# Altium PCB ShareBoard - i.MXRT1050_REV2 by wcabc.PcbDoc (part 2 of 3)
Units mil, origin at the board's own origin, x right, y up, seen from the top; angles counter-clockwise.
Board outline 1968.5 x 1968.5 mil, 4 copper layers (Top Layer, GND, POWER, Bottom Layer), stack 30.635 mil thick; 185 components, 196 nets, 977 pads, 468 vias.
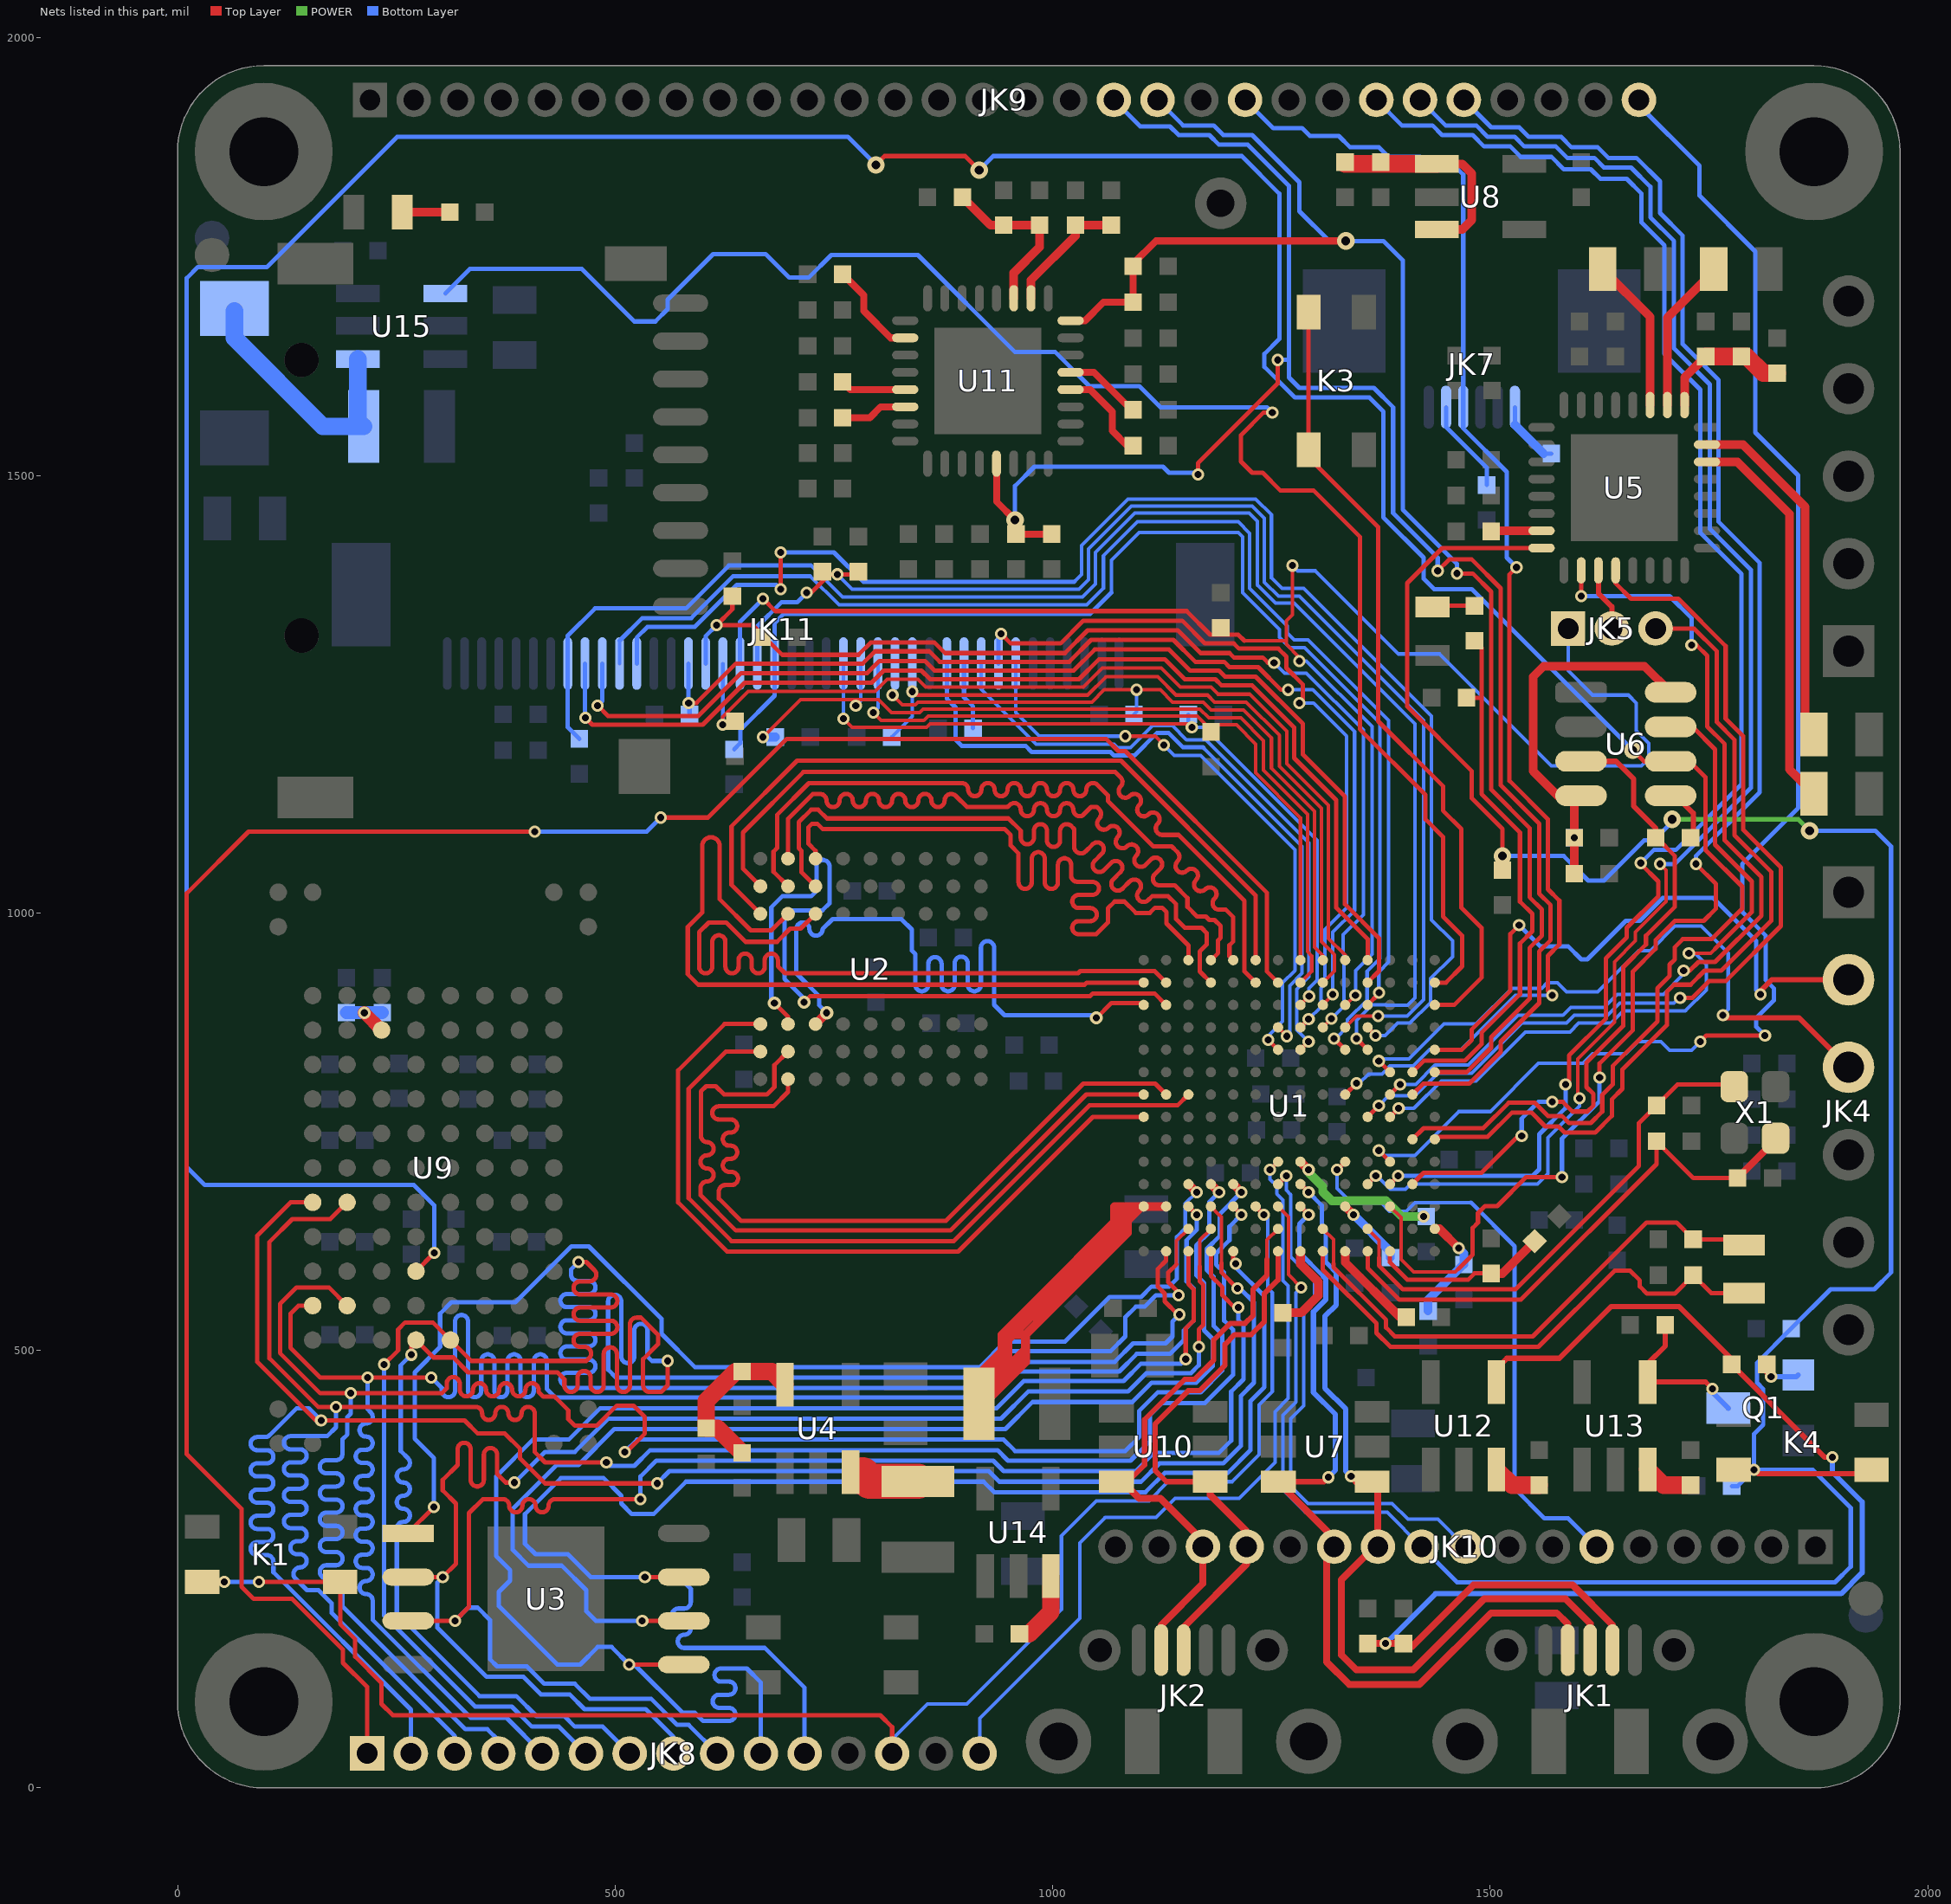
[diagram p4: the nets of this part, all layers, seen from the top]

## Via types
v1: diameter 14, hole 8, Top Layer to Bottom Layer, 294 vias
v2: diameter 20, hole 10, Top Layer to Bottom Layer, 65 vias
v3: diameter 15, hole 8, Top Layer to Bottom Layer, 53 vias
v4: diameter 30, hole 15, Top Layer to Bottom Layer, 50 vias
v5: diameter 16, hole 8, Top Layer to Bottom Layer, 3 vias
v6: diameter 40, hole 20, Top Layer to Bottom Layer, 2 vias
v7: diameter 50, hole 25, Top Layer to Bottom Layer, 1 vias

## Nets (pads, with @x,y where several pads share a name; then routed paths per layer and width w, separated by ;. In a path a pad name is that pad's centre, name@x,y a point inside that pad or via, vN(x,y) a via of type N, cw(c..) or ccw(c..) an arc to the next point about the centre after c; other vN are vias at no path point) (continued)
I2C3/UART3/GPIO/ADC6: JK10.6 U1.K10 | length 671.3
  Top Layer w5: v1(1324.97,706.34) U1.K10@1334.32,715.68
  Bottom Layer w4: v1(1324.97,706.34) 1324.97,685.03 1341.84,668.16 1375.84,668.16 1385,659 1404,659 1414,669 1478,669
  Bottom Layer w5: 1478,669 1528,619 1528,342 1562,308 1589.24,308 JK10.6@1621.65,275.59
JTAG_CLK: JK4.3 U1.F12 | length 742.9
  Top Layer w5: v1(1372.7,830.84) U1.F12@1385.5,818.05
  Top Layer w6: v1(1766,883) 1769,880 1853.07,880 JK4.3@1909.45,823.62
  Bottom Layer w4: v1(1372.7,830.84) 1374.86,833 1407,833 1447,873 1484,873 1525,914 1559,914 1565,920 1577,920 1587,910 1623,910 1670,957 1683,957 1711,985 1741,985 1772,954 1772,890 v1@1766,884
JTAG_SWD: JK4.2 U1.E14 | length 709.6
  Top Layer w5: U1.E14@1436.68,843.64 1467.64,843.64 1479,855 1479,867 1523,911 1523,976 v1(1533,986)
  Top Layer w6: v1(1809,907) 1809,911 1821.62,923.62 JK4.2@1909.45,923.62
  Bottom Layer w5: v1(1533,986) 1557,962 1589,962 1604,947 1611,947 1655,991 1671,991 1697,1017 1755,1017 1804,968 1804,912 v1(1809,907)
KEY1: K3.2 K3.4 U1.C14 | length 908.8
  Top Layer w5: K3.2@1292.5,1686.74 K3.4@1292.5,1529.26 1292.5,1520.5 1372,1441 1372,1219 1446,1145 1446,1117 1467,1096 1467,1006 1490,983 1490,926 1458.82,894.82 U1.C14@1436.68,894.82
KEY/GPIO/ADC2: JK9.24 U1.L12 | length 1814.1
  Top Layer w5: U1.L12@1385.5,690.09 v1(1394.84,699.44) ; v1(1586,804) 1590,808 1590,837 1632,879 1632,948 1656,972 1656,983 1692,1019 1692,1036 1672,1056 v1(1672,1057)
  Bottom Layer w5: JK9.24@1369.88,1929.13 1399.02,1900 1434,1900 1445,1889 1480,1889 1493,1876 1523,1876 1535,1864 1570,1864 1584,1850 1615,1850 1626,1839 1656,1839 1673,1822 1673,1789 1699,1763 1699,1639 1740,1598 1740,1434.5 1787,1387.5 1787,1147 1712,1072 1687,1072 v1(1672,1057) ; v1(1394.84,699.44) 1548.44,699.44 1556,707 1556,747 1586,777 v1(1586,804)
KEY/GPIO/ADC3: JK9.30 U1.K12 | length 1725.8
  Top Layer w5: v1(1372.7,728.48) U1.K12@1385.5,715.68 ; v1(1740,853) 1747,860 v1(1814,860)
  Bottom Layer w4: v1@1373.22,729 v1(1372.7,728.48) 1378.18,723 1414,723 1464,773 1500,773 1555,828 1606,828 1617,839 1655,839 1669,853 1695,853 1705,843 1730,843 v1(1740,853)
  Bottom Layer w5: JK9.30@1669.88,1929.13 1669.88,1923.12 1739,1854 1739,1820 1803,1756 1803,1549 1852,1500 1852,1120 1788,1056 1788,1001 1815,974 1815,923 1824,914 1824,900 1804,880 1804,870 v1(1814,860)
LCD_BL: U1.B14 U15.4 | length 1943.2
  Top Layer w5: v1(1251,1572) 1241,1572 1215,1546 1215,1516 1228,1503 1240,1503 1260,1483 1298,1483 1351,1430 1351,1210 1426,1135 1426,1107 1446,1087 1446,996 1468,974 1468,939 1449.41,920.41 U1.B14@1436.68,920.41
  Bottom Layer w5: U15.4@306,1708 334,1736 462,1736 522,1676 546,1676 560,1690 560,1701 612,1753 672,1753 699,1726 721,1726 747,1752 846,1752 957,1641 1003,1641 1042,1602 1099,1602 1123,1578 1245,1578 v1(1251,1572)
LCD_CLK: JK11.11 U1.D7 | length 797.9
  Top Layer w4: U1.D7@1257.54,869.23 v1(1267.66,859.11)
  Bottom Layer w4: 1172,1189 1285,1076 1285,931 1270.82,916.82 1270.82,862.28 v1(1267.66,859.11)
  Bottom Layer w5: JK11.11@879.01,1285 879.01,1244.99 889,1235 889,1198 896,1191 969,1191 976,1184 1066,1184 1070,1180 1093.5,1180 1119,1205.5 1132.59,1205.5 1148.59,1189.5 1171.48,1189.5 1171.98,1189 1172.48,1188.5
LCD_D0: JK11.17 R43.2 U1.C8 | length 877.6
  Top Layer w4: v1(761,1222) 771,1212 856,1212 860,1216 1155,1216 v1(1159,1212) ; U1.C8@1283.13,894.82 v1(1293,904.68)
  Bottom Layer w4: JK11.17@760.9,1285 760.9,1222.1 v1(761,1222) ; R43.2@1155,1227 1155,1216 v1(1159,1212) 1173,1212 1302,1083 1302,923 1293,914 v1(1293,904.68)
LCD_D1: JK11.16 R44.2 U1.B8 | length 981.6
  Top Layer w4: v1(669,1201) 712,1244 801,1244 816,1229 848,1229 852,1233 1168.31,1233 1178.31,1223 1215,1223 1241,1197 1241,1163 1291.13,1112.87 1291.13,955.87 1296,951 1296,933.28 U1.B8@1283.13,920.41
  Bottom Layer w4: v1(775,1237) 780.58,1242.58 JK11.16@780.58,1285
  Bottom Layer w10: v1(669,1201) R44.2@683,1201
LCD_D2: JK11.15 R45.2 U1.A8 | length 782.4
  Top Layer w4: v1(795,1229) 804,1220 852.69,1220 857.69,1225 1165,1225 1175,1215 1210,1215 1232,1193 1232,1160 1283.13,1108.87 U1.A8@1283.13,946
  Bottom Layer w4: v1(795,1229) 800.27,1234.27 JK11.15@800.27,1285
LCD_D3: JK11.14 R46.2 U1.A9 | length 774.9
  Top Layer w4: v1(817,1249) 828,1238 843.02,1238 846.01,1240.99 1045,1241 1059,1255 v1(1096,1255) 1123,1255 1137,1241 1172,1241 1181,1232 1218,1232 1250,1200 1250,1165.37 1299.13,1116.24 1299.13,961 1308.72,951.41 U1.A9@1308.72,946
  Bottom Layer w4: R46.2@1093,1227 1096,1230 v1(1096,1255)
LCD_D4: JK11.13 R41.2 U1.B9 | length 833.4
  Top Layer w4: v1(839.64,1253) 843.64,1249 1040,1249 1061,1270 1120,1270 1141,1249 1177,1249 1185,1241 1221,1241 1259,1203 1259,1167.69 1307.13,1119.55 1307.13,967 1322,952.13 1322,933.68 U1.B9@1308.72,920.41
  Bottom Layer w4: R41.2@816,1201 839.64,1224.64 v1(839.64,1253)
LCD_D5: JK11.26 R42.2 U1.C9 | length 1227.1
  Top Layer w4: U1.C9@1308.72,894.82 v1@1318.59,904.68
  Top Layer w5: v1(584,1240) 593,1240 638,1285 783,1285 797,1299 859,1299 871,1287 1019,1287 1044,1312 1138,1312 1163,1287 1196,1287 1202,1281 1235,1281 1261,1255 v1(1269,1255)
  Bottom Layer w4: v1(1269,1255) 1297,1255 1345,1207 1345,1003 1320,978 v1(1320,907)
  Bottom Layer w5: JK11.26@583.73,1285 583.73,1240.27 v1(584,1240) 585,1239 R42.2@585,1227
LCD_D6/SAI1_TD3: JK11.25 R47.2 R55.1 U1.D9 | length 1271.3
  Top Layer w4: U1.D9@1308.72,869.23 v1(1318.59,879.09)
  Top Layer w5: R55.1@634,1362 634,1347 v1(616,1329) 657,1329 691,1295 778,1295 792,1309 865,1309 877,1297 1014,1297 1040,1323 1143,1323 1169,1297 1202,1297 1207,1292 1240,1292 1246,1286 v1(1253,1286)
  Bottom Layer w4: v1(1253,1286) 1265,1274 1290,1274 1355,1209 1355,998 1332,975 1332,954 1333,953 1333,893.5 v1(1318.59,879.09)
  Bottom Layer w5: JK11.25@603.42,1285 603.42,1316.42 v1(616,1329)
LCD_D7/SAI1_TD2: JK11.24 R48.2 U1.A10 | length 1089.1
  Top Layer w4: R48.2@637,1219 627,1219 v1(623,1215) 623,1224 652,1253 797,1253 811,1267 846,1267 855,1258 1035,1258 1057,1280 1124,1280 1146,1258 1181,1258 1189,1250 1225,1250 1267.5,1207.5 1267.5,1170.5 1315.13,1122.87 1315.13,970.87 1334.32,951.68 U1.A10@1334.32,946
  Bottom Layer w4: v1(623,1215) 623.1,1215.1 JK11.24@623.1,1285
LCD_D8/SAI1_TD1: JK5.1 JK11.23 R49.2 U1.C10 | length 1982.4
  Top Layer w4: 1219,1311 1267,1311 ; v1(1274,1397) 1274,1341 1267,1334 1267,1307 1282,1292 v1(1282,1288) ; U1.C10@1334.32,894.82 1334.82,894.82 v1(1346,906)
  Top Layer w5: v1(669,1359) 683,1345 1153,1345 1180,1318 1212,1318 1219,1311
  Bottom Layer w4: v1(1274,1397) 1280,1391 1300,1391 1395,1296 1442,1296 1570,1168 1673,1168 1681,1176 1681,1194 1667,1208 1667,1240 1658,1249 1617,1249 1589,1277 JK5.1@1589,1325 ; v1(1282,1288) 1290,1288 1365,1213 1365,953 1346,934 v1(1346,906)
  Bottom Layer w5: JK11.23@642.79,1285 642.79,1332.79 v1(669,1359)
LCD_D9: JK11.22 R50.2 R56.1 U1.D10 | length 1496.1
  Top Layer w4: U1.D10@1334.32,869.23 1347.09,882 v1(1372,882)
  Top Layer w5: v1(719,1366) 724,1366 R50.2@745,1387 ; R50.2@737,1390 740,1387 R50.2@745,1387 ; R56.1@778,1390 775,1387 v1(754,1387) R50.2@745,1387
  Bottom Layer w4: v1(754,1387) 771,1370 1030,1370 1041,1381 1041,1416 1090,1465 1228,1465 1242,1451 1242,1378 1258,1362 1282,1362 1424,1220 1424,901 1405,882 v1(1372,882)
  Bottom Layer w5: JK11.22@662.47,1285 662.47,1327.47 690,1355 708,1355 v1(719,1366)
LCD_D10: JK11.21 R51.2 U1.E10 | length 1454.4
  Top Layer w5: v1(1321.52,856.43) U1.E10@1334.32,843.64
  Bottom Layer w4: 1067,1366 1067,1403 1099,1435 1212,1435 1217,1430 1217,1366 1259,1324 1259,1315 1271,1303 1288,1303 1374,1217 1374,948 1359.34,933.34 1359.34,900.66 1337,878.31 1337,870 1323.43,856.43 v1(1321.52,856.43)
  Bottom Layer w5: R51.2@636,1187 643,1194 643,1209 682.16,1248.16 JK11.21@682.16,1285 682.16,1331.16 693,1342 1043,1342 1067,1366
LCD_D11: JK11.33 R52.2 U1.E11 | length 1772.6
  Top Layer w5: v1(1347.11,856.43) U1.E11@1359.91,843.64
  Bottom Layer w4: 724,1397 760,1361 1034,1361 1049,1376 1049,1412 1094,1457 1224.69,1457 1234,1447.69 1234,1374.69 1254.69,1354 1276,1354 1414,1216 1414,903 1405.61,894.61 1381.39,894.61 1381,895 1365,895 1347.11,877.11 v1(1347.11,856.43)
  Bottom Layer w5: R52.2@459,1199 445.94,1212.06 JK11.33@445.94,1285 445.94,1316.94 477,1348 581,1348 630,1397 724,1397
LCD_D12: JK11.32 U1.A11 | length 1247.9
  Top Layer w5: v1(466,1223) 474,1215 600,1215 648,1263 793,1263 807,1277 850,1277 860,1267 1030,1267 1053,1290 1128,1290 1151,1267 1186,1267 1193,1260 1228,1260 1276,1212 1276,1177 1324,1129 1324,1006 1359.91,970.09 U1.A11@1359.91,946
  Bottom Layer w5: JK11.32@465.62,1285 465.62,1223.38 v1(466,1223)
LCD_D13: JK11.31 U1.B11 | length 1274
  Top Layer w5: v1(480,1237) 492,1225 595,1225 644,1274 788,1274 802,1288 854,1288 865,1277 1024,1277 1048,1301 1133,1301 1157,1277 1190,1277 1197,1270 1232,1270 1286,1216 1286,1181 1334,1133 1334,1010 1373,971 1373,933.5 U1.B11@1359.91,920.41
  Bottom Layer w5: v1(480,1237) 485.31,1242.31 JK11.31@485.31,1285
LCD_D14: JK11.30 U1.C11 | length 1482.6
  Top Layer w5: U1.C11@1359.91,894.82 1373,907.91 v1(1373,909)
  Bottom Layer w4: JK11.30@504.99,1285 JK11.30@504.99,1310.99 ; 723,1385 756,1352 1039,1352 1058,1371 1058,1408 1097,1447 1212,1447 1225,1434 1225,1371 1268,1328 1268,1320 1276,1312 1292,1312 1384,1220 1384,944 1372.7,932.7 v1@1372.7,907.61
  Bottom Layer w5: JK11.30@504.99,1310.99 531,1337 587,1337 635,1385 723,1385
LCD_D15: JK11.29 U1.D11 | length 1663.5
  Top Layer w5: v1(689,1370) v1(689,1412) ; U1.D11@1359.91,869.23 v1@1369.07,860.07
  Bottom Layer w4: 1025,1379 1033,1387 1033,1420 1086,1473 1232,1473 1250,1455 1250,1383 1262,1371 1287,1371 1433,1225 1433,992 1457,968 1457,950 1432,925 1432,897.69 1408.31,874 1394,874 1380,860 v1(1369,860)
  Bottom Layer w5: JK11.29@524.68,1285 524.68,1314.68 537,1327 591,1327 639,1375 684,1375 v1(689,1370) ; v1(689,1412) 750,1412 783.5,1378.5 1024.5,1378.5 1025,1379
LCD_EN: JK11.7 U1.E7 | length 686.2
  Top Layer w4: v1(1083,1202) 1117,1202 v1(1127,1192)
  Top Layer w5: v1(1246.13,855.05) U1.E7@1257.54,843.64
  Bottom Layer w4: JK11.7@957.75,1285 957.75,1229 984.75,1202 v1(1083,1202) ; v1(1127,1192) 1139,1180 1169,1180 1277,1072 1277,934.31 1262.82,920.13 1262.82,876 1246.13,859.32 v1(1246.13,855.05)
LCD_HSYNC: JK11.9 U1.E8 | length 749.1
  Top Layer w5: U1.E8@1283.13,843.64 v1(1292.48,852.98)
  Bottom Layer w4: JK11.9@918.38,1285 918.38,1255.62 981,1193 1070,1193 1074,1189 1089,1189 1114,1214 1137,1214 1153,1198 1175,1198 1293,1080 1293,927 1279,913 1279,866.46 v1(1292.48,852.98)
LCD_VSYNC: JK11.8 U1.D8 | length 878
  Top Layer w5: v1(941,1319) 952,1308 1009,1308 1035,1334 1148,1334 1174,1308 1207,1308 1213,1302 1258,1302 1267,1293 1267,1280 1286,1261 1286,1244 v1(1282,1240) ; U1.D8@1283.13,869.23 v1(1292.48,878.57)
  Bottom Layer w4: v1(1282,1240) 1298,1240 1336,1202 1336,1006 1311,981 1311,919 1306.5,914.5 1306.5,892.59 v1(1292.48,878.57)
  Bottom Layer w5: JK11.8@938.06,1285 938.06,1315.06 v1@940,1317
LED1: R12.2 R15.2 U1.F13 | length 621.9
  Top Layer w5: U1.F13@1411.09,818.05 1424.04,831 1471,831 1490,850 1490,863 1534,907 1534,965 1548,979 1548,999 1534,1013 1534,1092 1490,1136 1490,1245 ; R15.2@1473,1246 1489,1246 1490,1245 ; R12.2@1482,1311 1490,1303 1490,1245
NetC1_1: C1.1 U1.N11 X1.1 | length 591.1
  Top Layer w4: U1.N11@1359.91,638.91 1373,625.82 1373,606
  Top Layer w5: 1373,606 1373,597 1400,570 1529,570 1670,711 1670,760 C1.1@1690,780 1714,804 1776.46,804 X1.1@1778.94,801.53
NetC2_1: C2.1 R38.1 U1.P11 X1.2 | length 628
  Top Layer w5: U1.P11@1359.91,613.32 1359.91,594.09 1396,558 1535,558 1690,713 C2.1@1690,739 1732,697 R38.1@1782.56,697
  Top Layer w8: R38.1@1782.56,697 1826.18,740.62 X1.2@1826.18,742.47
NetC3_1: C3.1 U1.N9 X2.1 | length 613.7
  Top Layer w4: U1.N9@1308.72,638.91 1321,626.64 1321,599
  Top Layer w5: 1321,599 1321,595 1381,535 1381,526 1391,516 1548.5,516 1678.5,646 1713,646 C3.1@1732,627 X2.1@1786,627
NetC4_1: C4.1 U1.P9 X2.2 | length 613.5
  Top Layer w5: U1.P9@1308.72,613.32 1308.72,592.28 1370,531 1370,520 1386,504 1555,504 1642,591 1660,591 1671,580 1671,573 1679,565 1711,565 C4.1@1732,586 1752.56,565.44 X2.2@1790,565.44
NetC8_1: C8.1 FB2.1 U1.N14 | length 128.5
  Top Layer w10: U1.N14@1436.68,638.91 1442.09,638.91 v1(1464,617)
  Bottom Layer w10: FB2.1@1429,545 1429,558 1469,598 C8.1@1470,598 1470,611 v1(1464,617)
NetC11_1: C11.1 U5.14 | length 450.6
  Top Layer w10: U5.14@1747.66,1515.53 1782.46,1515.53 1842,1456 1842,1164.01 C11.1@1870.01,1136
NetC13_1: C13.1 FB1.1 U1.P12 | length 204.4
  Top Layer w5: U1.P12@1385.5,613.32 1385.5,600.5 1405,581 1475,581 1482,588 C13.1@1501,588
  Top Layer w10: C13.1@1501,588 1514,588 FB1.1@1550.86,624.86
NetC14_1: C14.1 U1.P8 | length 107.8
  Top Layer w10: C14.1@1263,543 1284,543 1303.5,562.5 1303.5,578.5 1283.13,598.87 U1.P8@1283.13,613.32
NetC15_1: C15.1 U1.P10 | length 112.3
  Top Layer w10: U1.P10@1334.32,613.32 1334.32,604.68 1334.32,600.68 1397,538 C15.1@1404,538 ; C15.1@1399,540 C15.1@1403,540
NetC20_2: C20.2 U1.M10 | length 79.9
  Top Layer w10: U1.M10@1334.32,664.5 v1(1343.66,655.16)
  Bottom Layer w10: v1(1343.66,655.16) 1386,612.82 C20.2@1386,606
NetC21_1: C21.1 R3.2 U8.1 U8.3 | length 247.1
  Top Layer w10: U8.3@1439,1781 1468,1781 1479,1792 1479,1845 1468,1856 U8.1@1439,1856
  Top Layer w20: R3.2@1334,1856 U8.1@1439,1856
NetC27_1: C27.1 U5.19 | length 177.9
  Top Layer w10: C27.1@1628.5,1736 1628.5,1735.5 1682.69,1681.31 U5.19@1682.69,1580.5
NetC28_1: C28.1 C47.1 R1.1 U5.17 | length 155.2
  Top Layer w10: U5.17@1722.07,1580.5 1722.07,1611.91 C47.1@1746.16,1636
  Top Layer w20: C47.1@1746.16,1636 C28.1@1787.16,1636 1793,1636 1812,1617 R1.1@1828,1617
NetC29_1: C29.1 U5.31 | length 57.8
  Top Layer w10: C29.1@1501.16,1436 1501.93,1436.77 U5.31@1558.66,1436.77
NetC42_1: C42.1 R7.2 R8.1 U4.5 | length 193.9
  Top Layer w20: C42.1@645,383 617,411 R7.2@604,411 604,442 638,476 R8.1@645,476 679,476 U4.5@694,461
NetC43_1: C43.1 U5.15 | length 406
  Top Layer w10: U5.15@1747.66,1535.22 1788.78,1535.22 1860,1464 1860,1214.01 C43.1@1870.01,1204
NetC44_1: C44.1 U5.18 | length 177.5
  Top Layer w10: U5.18@1702.38,1580.5 1702.38,1680.38 1755.5,1733.5 C44.1@1755.5,1736
NetC45_1: C45.1 C46.1 R9.1 U6.4 U6.8 | length 441.2
  Top Layer w10: R9.1@1596,1045 v1(1596,1086) 1596,1126.13 U6.4@1603.82,1133.94 1577.06,1133.94 1549,1162 1549,1270 1561,1282 1676.24,1282 U6.8@1706.18,1252.06
NetC48_1: C48.1 C49.1 U9.E4 | length 69
  Top Layer w15: v1(213.43,885.83) U9.E4@233.11,866.14
  Bottom Layer w15: C49.1@192.95,886 213.25,886 v1(213.43,885.83) 213.6,886 C48.1@233.95,886
NetC51_2: C51.2 C52.2 FB3.1 U11.3 | length 197
  Top Layer w10: FB3.1@897,1818 929,1786 C51.2@944,1786 C52.2@985,1786 985,1761 955.54,1731.53 U11.3@955.54,1702.5
NetC53_1: C53.1 C55.1 U11.2 | length 145.5
  Top Layer w10: U11.2@975.22,1702.5 975.22,1723.22 1026,1774 C55.1@1026,1786 C53.1@1067,1786
NetC70_2: C70.2 U1.K8 | length 172.1
  Top Layer w10: U1.K8@1283.13,715.68 v1(1292.48,706.34)
  POWER w10: v1(1292.48,706.34) 1292.48,703.38 1308.48,687.38 1308.48,681.52 1319,671 1336.87,671 1337.03,671.16 1380.84,671.16 1399,653 v1(1424,653)
NetD1_1: D1.1 L2.2 U15.1 | length 300.3
  Bottom Layer w20: D1.1@65,1688 65,1657 166,1556 L2.2@212.69,1556 206,1562.69 U15.1@206,1633
NetJK5_2: JK5.2 U5.3 | length 72.9
  Top Layer w6: U5.3@1623.62,1391.5 1623.62,1365.38 1639,1350 JK5.2@1639,1325
NetJK7_2: JK7.2 R58.1 | length 108.3
  Bottom Layer w5: JK7.2@1449.47,1578 1449.47,1555.53 1496,1509 R58.1@1496,1489
NetJK7_6: JK7.6 R57.1 | length 75.6
  Bottom Layer w5: JK7.6@1528.21,1557.79 JK7.6@1528.21,1578 ; R57.1@1561,1525 R57.1@1570,1525
  Bottom Layer w10: JK7.6@1528.21,1557.79 R57.1@1561,1525
NetJK11_10: JK11.10 R32.1 | length 78.3
  Bottom Layer w5: JK11.10@898.69,1285 898.69,1246.31 909,1236 R32.1@909,1211
NetL1_1: L1.1 U4.3 | length 66.2
  Top Layer w40: 783,358 790.69,350.31 L1.1@846,350.31
NetL3_1: L3.1 U1.M1 U1.M2 | length 1043.5
  Top Layer w10: L3.1@915.69,460.69 949,494 949,512 999,562 1080,643 ; L3.1@915.69,472.69 942,499 942,518 ; 1080,647.5 1097,664.5 ; 1080,664 1080,643 ; 1085.25,652.75 1085.25,634.25 969,518 ; 1090.25,657.75 1090.25,653.25 ; U1.M1@1101.5,664.5 1090.25,653.25 ; U1.M2@1129.59,664.5 U1.M1@1104,664.5 1070.5,664.5 1070.5,646.5 985,561 942,518 ; 942,518 969,518 ; 969,501 969,487 921,439 L3.1@915.69,439 915.69,447.69 969,501 ; 969,501 969,518 ; 1080,643 1090.25,653.25
NetLED1_1: LED1.1 R12.1 | length 48.6
  Top Layer w5: LED1.1@1434,1349.56 1435.44,1351 R12.1@1482,1351
NetLED2_1: LED2.1 R13.1 | length 54.4
  Top Layer w10: LED2.1@256.56,1801 R13.1@311,1801
NetQ1_1: Q1.1 R36.1 | length 47.9
  Top Layer w6: R36.1@1816,484 1816,475 v1(1821,470)
  Bottom Layer w6: v1(1821,470) 1850,470 Q1.1@1852,472
NetQ1_3: Q1.3 R35.1 U13.4 | length 180.1
  Top Layer w6: R35.1@1700,529 1700,505 1680,485 U13.4@1680,464 1746,464 v1(1754,456)
  Bottom Layer w6: v1(1754,456) 1754,452 Q1.3@1772,434
NetR2_2: R2.2 U6.5 | length 62.1
  Top Layer w6: U6.5@1706.18,1133.94 1712.06,1133.94 1732,1114 R2.2@1732,1086
NetR22_2: R22.2 U11.14 | length 76.7
  Top Layer w8: R22.2@760,1566 791,1566 803.47,1578.47 U11.14@831.5,1578.47
NetR23_2: R23.2 U11.13 | length 75.2
  Top Layer w8: R23.2@760,1607 768.85,1598.15 U11.13@831.5,1598.15
NetR24_1: R24.1 U11.29 | length 89.2
  Top Layer w8: U11.29@1020.5,1617.85 1047.16,1617.85 1090,1575 R24.1@1092,1575
NetR25_1: R25.1 U11.28 | length 111
  Top Layer w8: U11.28@1020.5,1598.15 1042.84,1598.15 1068,1573 1068,1551 1085,1534 R25.1@1092,1534
NetR29_2: R29.2 U11.10 | length 112.2
  Top Layer w8: R29.2@760,1730 784,1706 784,1688 814.78,1657.22 U11.10@831.5,1657.22
NetR33_1: R33.1 U13.3 | length 56.5
  Top Layer w20: U13.3@1680,364 1698,346 R33.1@1729,346
NetR34_1: R34.1 U12.3 | length 56.5
  Top Layer w20: U12.3@1507,364 1525,346 R34.1@1556,346
NetR37_1: R37.1 U14.3 | length 87.4
  Top Layer w20: R37.1@962,176 973,176 998,201 U14.3@998,242
ONOFF: JK8.13 K1.2 K1.4 U1.M6 | length 1858.4
  Top Layer w5: K1.2@28.26,235.5 v1(53.5,235.5) ; v1(93.01,235.5) K1.4@185.74,235.5 185.74,187.26 203,170 203,150 233,120 233,96 246,83 803,83 816.54,69.46 JK8.13@816.54,39.37 ; U1.M6@1231.95,664.5 v1(1241.3,655.16)
  Bottom Layer w4: JK8.13@816.54,39.37 816.54,55.54 857,96 902,96 1010,204 1010,288 1050,328 1110,328 1132,350 1205,350 1236,381 1236,438 1251,453 1251,566 1246,571 1246,650.46 v1(1241.3,655.16)
  Bottom Layer w5: v1(53.5,235.5) v1(93.01,235.5)
OTG1_D+: JK1.3 JK10.11 U1.L8 U7.1 | length 982.5
  Top Layer w5: U1.L8@1283.13,690.09 v1(1292.48,680.75)
  Top Layer w8: v1(1341,356) 1347,350 U7.1@1365,350 1371.65,343.35 JK10.11@1371.65,275.59 1367.59,275.59 1330,238 1330,152 1347,135 1412,135 1493,216 1586,216 1614.17,187.83 JK1.3@1614.17,157.48
  Bottom Layer w5: v1(1292.48,680.75) 1307.5,665.73 1307.5,641 1312,636.5 1312,601 1320,593
  Bottom Layer w6: 1320,593 1324,589 1324,552 1311,539 1311,457 1335,433 1335,362 v1(1341,356)
OTG1_D-: JK1.2 JK10.12 U1.M8 U7.6 | length 1000.1
  Top Layer w5: U1.M8@1283.13,664.5 v1(1292.48,655.16)
  Top Layer w6: U7.6@1258,350 1310,350 v1(1315,355)
  Top Layer w8: U7.6@1258,350 1258,349 1321.65,285.35 JK10.12@1321.65,275.59 1313,266.94 1313,144 1339,118 1419,118 1501,200 1576,200 1588.58,187.42 JK1.2@1588.58,157.48
  Bottom Layer w5: v1(1292.48,655.16) 1282,644.68 1282,612 1309,585
  Bottom Layer w6: 1309,585 1312,582 1312,558 1298,544 1298,452 1323,427 1323,363 v1(1315,355)
OTG1_ID: JK1.4 R5.2 R6.1 R36.2 U12.4 | length 1581.8
  Top Layer w6: U12.4@1507,464 1507,479 1519,491 1579,491 1638,550 1716,550 1776,490 R36.2@1776,484 1882,378 v1(1891,378)
  Top Layer w8: R6.1@1360,165 v1(1380.5,165) R5.2@1401,165 ; R5.2@1403,162 1411,162 1481,232 1594,232 1639.76,186.24 JK1.4@1639.76,157.48
  Bottom Layer w6: v1(1380.5,165) 1437.5,222 1901,222 1925,246 1925,327 1891,361 v1(1891,378)
OTG2_D+: JK2.3 JK10.14 U1.P7 U10.1 | length 635.3
  Top Layer w6: U10.1@1180,350 1130,350 1117,363 1117,416 1155,454 1168,454 1197,483 1197,507 1208,518 1227,518 1242,533 1242,565 1257.54,580.54 U1.P7@1257.54,613.32
  Top Layer w8: JK2.3@1149.61,157.48 1149.61,183.61 1221.65,255.65 JK10.14@1221.65,275.59 1221.65,293.35 1180,335 U10.1@1180,350
OTG2_D-: JK2.2 JK10.15 U1.N7 U10.6 | length 653.6
  Top Layer w4: 1245,604 1245,626.37 U1.N7@1257.54,638.91
  Top Layer w6: U10.6@1080,350 1086,350 1105,369 1105,421 1151,467 1162,467 1184,489 1184,512 1203,531 1220,531 1229,540 1229,570 1245,586 1245,604
  Top Layer w8: U10.6@1073,350 1080,350 1099,331 1123,331 1171.65,282.35 JK10.15@1171.65,275.59 1171.65,233.65 1124.02,186.02 JK2.2@1124.02,157.48
PW_ON_REQ: JK8.15 U1.K7 | length 911.5
  Top Layer w5: v1(1248.2,706.34) U1.K7@1257.54,715.68
  Bottom Layer w4: JK8.15@916.54,39.37 916.54,79.54 1031,194 1031,280 1060,309 1118,309 1140,331 1213,331 1254,372 1254,430 1269,445 1269,574 1263,580 1263,672 1256,679 1256,688 1248.2,695.8 v1(1248.2,706.34)
PW_STBY_REQ: JK10.9 U1.L7 | length 620.5
  Top Layer w5: U1.L7@1257.54,690.09 v1(1266.89,699.44)
  Bottom Layer w4: v1(1266.89,699.44) 1266.89,683.11 1272,678 1272,607 1299,580 1299,561 1287,549 1287,437 1272,422 1272,345 1292,325 1388,325 1406,307 1440.24,307 JK10.9@1471.65,275.59
PWM1_A3/ENET_INT: JK9.18 R26.2 R27.2 U1.G13 U11.21 | length 2163.9
  Top Layer w5: v1(1166,1501) 1166,1514 1257,1605 v1(1257,1632) ; U1.G13@1411.09,792.46 1423.63,805 1476,805 1512,841 1512,853 1556,897 1556,956 1569,969 1569,1009 1556,1022 1556,1102 1512,1146 1512,1371 1479,1404 1453,1404 v1(1440,1391)
  Top Layer w8: U11.21@935.84,1513.5 935.84,1470.15 v2(957,1449) 958,1448 R27.2@958,1433 R26.2@999,1433
  Bottom Layer w5: v2(957,1449) 957,1488 979,1510 1126,1510 1133,1503 1164,1503 v1(1166,1501) ; JK9.18@1069.88,1929.13 1100.02,1899 1134,1899 1144,1889 1179,1889 1190,1878 1223,1878 1270,1831 1270,1631 ; v1(1257,1632) 1269,1632 1270,1631 ; v1(1440,1391) 1440,1406 1389,1457 1389,1578 1367,1600 1282,1600 1270,1612 1270,1631
PWM1_B3/TP_I\N\T\: JK7.3 JK9.21 U1.G10 | length 1565.7
  Top Layer w5: U1.G10@1334.32,792.46 v1(1347.11,805.25) ; v1(1530,1395) 1522,1387 1522,1151 1566,1107 1566,1027 1579,1014 1579,964 1566,951 1566,911 v1(1571,906)
  Bottom Layer w4: v1(1347.11,805.25) 1350.25,805.25 1361,816 1376.24,816 1385.24,825 1412,825 1431,844 1467,844 1529,906 v1(1571,906)
  Bottom Layer w5: JK9.21@1219.88,1929.13 1252.02,1897 1285,1897 1294,1888 1327,1888 1340,1875 1373,1875 1384,1864 1420,1864 1430,1854 1459,1854 1469.16,1843.84 JK7.3@1469.16,1578 1469.16,1553.84 1519,1504 1519,1406 v1(1530,1395)
PWM2_A3/ENET_R\S\T\: C50.1 JK9.19 R28.2 U1.F14 U11.32 | length 1829.6
  Top Layer w5: U1.F14@1436.68,818.05 1473.05,818.05 1501,846 1501,858 1545,902 1545,960 1559,974 1559,1004 1545,1018 1545,1097 1501,1141 1501,1367 1480,1388 v1(1462,1388)
  Top Layer w8: U11.32@1020.5,1676.91 1036.92,1676.91 1058,1698 C50.1@1092,1698 R28.2@1092,1739 1092,1742 1118,1768 v2(1335,1768)
  Bottom Layer w5: JK9.19@1119.88,1929.13 1149.02,1900 1184,1900 1195,1889 1228,1889 1282,1835 1282,1802 1316,1768 v2(1335,1768) 1378,1768 1400,1746 1400,1461 1462,1399 v1(1462,1388)
QSPI_C\S\: U1.L3 U3.1 | length 1388.5
  Top Layer w5: U3.1@263.52,291 263.52,291.52 v1(293,321)
  Top Layer w10: U1.L3@1155.18,690.09 v1(1164.52,680.75)
  Bottom Layer w4: 1142,630 1151.52,639.52 1151.52,667.75 v1(1164.52,680.75)
  Bottom Layer w5: v1(293,321) 293,377 271,399 271,475 300,504 300,542 313,555 386,555 450,619 470,619 553,536 553,519 591,481 917,481 946,510 1014,510 1065,561 1101,561 1113,573 1133,573 1142,582 1142,630
QSPI_CLK: U1.L4 U3.6 | length 1388.3
  Top Layer w5: v1(531,191) U3.6@578.48,191
  Top Layer w10: U1.L4@1180.77,690.09 v1(1190.11,680.75)
  Bottom Layer w5: v1(531,191) 478,191 467,202 467,226 439,254 401,254 383,272 383,319 433,369 458,369 499,410 946,410 977,441 1091,441 1113,463 1164,463 1183,482 1183,513 1173,523 1173,577 1164,586 1164,620 1179,635 1179,669.64 v1(1190.11,680.75)
QSPI_D0/SD2_D4: JK8.10 U1.P3 U3.5 | length 1788
  Top Layer w5: v1(516,141) U3.5@578.48,141 ; v1(1152,490) 1152,525 1161,534 1161,570 1155.18,575.82 U1.P3@1155.18,613.32
  Bottom Layer w5: JK8.10@666.54,39.37 666.54,120.46 650.5,136.5 621,136.5 ccw(c621,129) 621,121.5 630,121.5 cw(c630,114) 630,106.5 619,106.5 ccw(c619,99) 619,91.5 630,91.5 cw(c630,84) 630,76.5 600.5,76.5 591,86 577,86 522,141 v1(516,141) 496,161 480,161 460,141 434,141 367,208 367,224 380,237 380,249 364,265 364,356 406,398 447,398 483,434 936,434 967,465 1081,465 1101,485 1147,485 v1(1152,490)
QSPI_D1/SD2_D5: JK8.8 U1.N4 U3.2 | length 1788.9
  Top Layer w4: 1168,596 1168,626.14 U1.N4@1180.77,638.91
  Top Layer w5: U3.2@263.52,241 v1(303,241) 318,256 318,325 303,340 303,352 320,369 320,387 cw(c327.5,387) 335,387 335,352 ccw(c342.5,352) 350,352 350,381 cw(c357.5,381) 365,381 365,359 375,349 v1(385,349) ; v1(1167,504) 1167,524 1172,529 1172,575 1168,579 1168,596
  Bottom Layer w5: v1(303,241) 297,235 297,183 353,127 395,127 415,107 448,107 465,90 535,90 566.54,58.46 JK8.8@566.54,39.37 ; v1(385,349) 420,384 454,384 492,422 941,422 972,453 1086,453 1107,474 1158,474 1167,483 v1(1167,504)
QSPI_D2/SD2_D6: JK8.9 U1.P4 U3.3 | length 1789
  Top Layer w5: U3.3@263.52,191 v1(317,191) 333,207 333,314 349,330 372,330 cw(c371.53,322.51) 379.03,322.51 ccw(c386.53,322.51) 394.03,322.51 cw(c401.53,322.51) 409.03,322.51 ccw(c416.53,322.51) 424.03,322.51 cw(c431.53,322.51) 430.81,329.98 v1(529,330) ; U1.P4@1180.77,613.32 1180.77,585.23 1194,572 1194,563 1208,549 v1(1212,549)
  Bottom Layer w5: v1(317,191) 332,206 343,206 357,192 357,147 365,139 399,139 419,119 454,119 471,102 541,102 571,72 584,72 616.54,39.46 JK8.9@616.54,39.37 ; v1(529,330) 529,356 547,374 932,374 944,362 1095,362 1116,383 1190,383 1204,397 1204,453 1218,467 1218,529 1212,535 v1(1212,549)
QSPI_D3/SD2_D7: JK8.11 U1.P5 U3.7 | length 1788.4
  Top Layer w5: v1(534,241) U3.7@578.48,241 ; U1.P5@1206.36,613.32 1206.36,601.64 v1(1209,599)
  Bottom Layer w5: JK8.11@716.54,39.37 716.54,114.46 671,160 579,160 cw(c579,167.5) 579,175 ccw(c579,182.5) 579,190 572.5,190 cw(c572.5,197.5) 572.5,205 579,205 ccw(c579,212.5) 586.49,212.92 586.49,227.51 573,241 v1(534,241) 472,241 446,267 409,267 397,279 397,313 438,354 487,354 507,334 507,325 519,313 544,313 581,350 921,350 933,338 1106,338 1128,360 1200,360 1226,386 1226,442 1242,458 1242,562 1209,595 v1(1209,599)
R\S\T\: C12.1 JK10.10 K4.2 K4.4 R4.1 R10.1 U1.M7 U5.32 | length 3282.1
  Top Layer w4: U1.M7@1257.54,664.5 1269.45,652.6 1269.45,586.55 v1(1284,572)
  Top Layer w5: R10.1@1514,1049 v2(1514,1065) 1514,1096 1479,1131 1479,1162 1405,1236 1405,1377 1445.09,1417.09 U5.32@1558.66,1417.09 ; K4.2@1778.26,363.5 v1(1801.5,363.5)
  Top Layer w6: v1(1801.5,363.5) 1806,359 K4.4@1931.24,359
  POWER w5: v2(1708,1107) 1852,1107 v2(1865,1094)
  Bottom Layer w4: v1(1284,572) 1278,566 1278,441 1263,426 1263,341 1289,315 1382.24,315 JK10.10@1421.65,275.59
  Bottom Layer w5: JK10.10@1421.65,275.59 1462.24,235 1894,235 1912,253 1912,320 1868.5,363.5 v1(1801.5,363.5) ; v2(1514,1065) 1584,1065 1612,1037 1630,1037 1676,1083 1687,1083 1708,1104 v2(1708,1107) ; C12.1@1776,345 1782.99,345 v1(1801.5,363.5) ; v2(1865,1094) 1940,1094 1958,1076 1958,589 1939,570 1889,570 R4.1@1844,525 1805,486 1805,463 1812,456 1812,415 1801.5,404.5 v1(1801.5,363.5)
S/PDIF_RX/UART2_RX: JK9.26 U1.M12 | length 1923.9
  Top Layer w4: U1.M12@1385.5,664.5 1398,652 1398,604 1412.5,589.5 1460,589.5 1463.5,593
  Top Layer w5: 1463.5,593 1480,609.5 1480,640 1486,646 1486,657 1494,665 1508,665 1541,698 v1(1582,698) ; v1(1625,812) 1625,828 1663,866 1663,933 1689,959 1689,969 1711,991 1744,991 1758,1005 1758,1033 v1(1735,1056)
  Bottom Layer w5: JK9.26@1469.88,1929.13 1501.02,1898 1533,1898 1544,1887 1581,1887 1593,1875 1623,1875 1635,1863 1667,1863 1694,1836 1694,1800 1720,1774 1720,1650 1761,1609 1761,1526 ; v1(1582,698) 1582,742 1625,785 v1(1625,812) ; v1(1735,1056) 1735,1065 1808,1138 1808,1400 1763,1445 1761,1447 1761,1526 ; 1761,1545 1761,1526
S/PDIF_TX/UART2_TX: JK9.25 U1.L11 | length 1816.3
  Top Layer w4: v1@1600,788 1600,833 1642,875 1642,944 1666,968 1666,978 1701,1013 1701,1049 v1(1694,1056)
  Top Layer w5: U1.L11@1359.91,690.09 v1(1369.25,699.44)
  Bottom Layer w4: v1(1369.25,699.44) 1370.56,699.44 1386,684 1403,684 1409,690 1554,690 1566,702 1566,743 1602,779 v1(1602,788)
  Bottom Layer w5: JK9.25@1419.88,1929.13 1449.02,1900 1484,1900 1497,1887 1528,1887 1539,1876 1575,1876 1588,1863 1619,1863 1630,1852 1661,1852 1683,1830 1683,1795 1710,1768 1710,1645 1751,1604 1751,1439 1798,1392 1798,1143 1711,1056 v1(1694,1056)
SAI_RX_BCLK/SD2_R\S\T\: U1.J13 U6.6 U9.M5 | length 4486.9
  Top Layer w5: U9.M5@272.48,590.55 v1(293.3,611.37) ; v2(798,1855) 808,1865 900,1865 v2(916,1849) ; U1.J13@1411.09,741.28 1423.81,754 1492,754 1521,783 1551,783 1566,768 1582,768 1590,760 1615,760 1628,773 1628,792 1640,804 1640,825 1691,876 1691,914 1705,928 1705,941 1711,947 1711,961 1720,970 1753,970 1788,1005 1788,1030 1746,1072 1746,1155 1727.68,1173.31 U6.6@1706.18,1173.31 1675.68,1173.31 v2(1663,1186)
  Bottom Layer w5: v1(293.3,611.37) 293.3,665.7 270,689 31,689 10.5,709.5 10.5,1725.5 23,1738 102,1738 135,1771 251,1887 766,1887 v2(798,1855) ; v2(916,1849) 932,1865 1216,1865 1259,1822 1259,1656 1242,1639 1242,1624 1277,1589 1362,1589 1378,1573 1378,1452 1424,1406 1424,1382 1436,1370 1479,1370 v2(1663,1186)
SAI_RX_DATA: U1.H12 U6.7 | length 832.3
  Top Layer w4: v1(1727,954) 1752,954 1757,959
  Top Layer w5: U1.H12@1385.5,766.87 v1(1395.41,776.78) ; U6.7@1706.18,1212.68 1731.32,1212.68 1757,1187 1757,1078 1799,1036 1799,1001 1757,959
  Bottom Layer w4: v1(1395.41,776.78) 1412.78,776.78 1444,808 1484,808 1540,864 1591,864 1601,874 1638,874 1652,888 1723,888 1747,912 1747,941 1734,954 v1(1727,954)
SAI_RX_LRCK: R2.1 U1.L13 U6.3 | length 771.8
  Top Layer w5: U1.L13@1411.09,690.09 1423.99,703 1490,703 1532,745 v1(1536,745) ; v1(1571,784) 1583,784 1594,773 1611,773 1618,780 1618,793 1610,801 1610,829 1652,871 1652,938 1678,964 1678,974 1711,1007 1711,1065 1690,1086 R2.1@1689,1086
  Top Layer w6: U6.3@1603.82,1173.31 1643.68,1173.31 1664,1153 1664,1122 1689,1097 R2.1@1689,1086
  Bottom Layer w5: v1(1536,745) 1536,765 1555,784 v1(1571,784)
SAI_TX_BCLK: U1.G12 U5.2 | length 1054.2
  Top Layer w4: v1(1603.93,1362.07) v1@1604,1362
  Top Layer w5: U1.G12@1385.5,792.46 v1(1397,804) ; v1(1603.93,1362.07) U5.2@1603.93,1391.5 ; v1(1721,934) 1728,934 1738,944 1757,944 1810,997 1810,1041 1768,1083 1768,1193 1748,1213 1748,1294 1736,1306 v1(1730,1306)
  Bottom Layer w4: v1(1397,804) 1415,804 1437,826 1475,826 1532,883 1583,883 1592,892 1630,892 1645,907 1698,907 1721,930 v1(1721,934)
  Bottom Layer w5: v1(1603.93,1362.07) 1704.93,1362.07 1730,1337 v1(1730,1306)
SAI_TX_D0: U1.H11 U5.4 | length 1074.4
  Top Layer w5: U1.H11@1359.91,766.87 v1@1369.82,776.78 ; U5.4@1643.31,1391.5 1643.31,1376.69 1661,1359 1715,1359 1769,1305 1769,1222 1789,1202 1789,1095 1832,1052 1832,985 1769,922 1750,922 1731,903 v1(1717,903)
  Bottom Layer w4: v1(1372.7,779.66) 1384.04,791 1414,791 1440,817 1479,817 1536,874 1587,874 1596,883 1634,883 1648,897 1710,897 v1@1716.5,903.5
SAI_TX_LRCK: JK5.3 U1.J14 | length 967.5
  Top Layer w5: U1.J14@1436.68,741.28 1439.4,744 1497,744 1525,772 1547,772 1563,756 1578,756 1585,749 1620,749 1639,768 1639,787 1651,799 1651,821 1702,872 1702,910 1710,918 1729,918 1745,934 1764,934 1821,991 1821,1047 1779,1089 1779,1198 1759,1218 1759,1299 1733,1325 JK5.3@1689,1325
SD2_CLK: JK8.6 U1.P2 U9.P6 | length 2441.6
  Top Layer w5: v1(236,484) 252,500 252,524 260,532 291.66,532 U9.P6@311.85,511.81 335.66,488 467.1,488 470.53,491.43 ccw(c465,496.5) 465,504 460,504 cw(c460,511.5) 460,519 495,519 ccw(c495,526.5) 495,534 460,534 cw(c460,541.5) 460,549 495,549 ccw(c495,556.5) 495,564 460,564 cw(c460,571.5) 460,579 471,579 ccw(c471,586.5) 476.5,591.6 467.1,601 v1(458,601) ; U1.P2@1129.59,613.32 1129.59,602.59 1120,593 1120,573 1128,565 1128,556 1143,541 v1(1145,541)
  Bottom Layer w5: v1(236,484) 236,197 340,93 382,93 405,70 435.91,70 JK8.6@466.54,39.37 ; v1(458,601) 449.51,592.51 449.51,586.51 ccw(c457,586.98) 457,579.48 470,579.48 cw(c470,571.98) 470,564.48 445,564.48 ccw(c445,556.98) 445,549.48 470,549.48 cw(c470,541.98) 470,534.48 445,534.48 ccw(c445,526.98) 445,519.48 470,519.48 cw(c470,511.98) 470,504.48 445,504.48 ccw(c445,496.98) 445,489.48 470,489.48 cw(c470,481.98) 470,474.48 445,474.48 ccw(c445,466.98) 439.69,461.69 444.38,457 926,457 956,487 1071,487 1092,508 1129,508 1137,516 1137,533 v1(1145,541)
SD2_CMD: JK8.7 U1.N3 U9.P5 | length 2439.2
  Top Layer w4: 1141.5,598.5 1141.5,625.23 U1.N3@1155.18,638.91
  Top Layer w5: v1(267,495) 267,506.33 U9.P5@272.48,511.81 292.29,492 315,492 332,475 434,475 442,467 442,460 ccw(c449.5,460) 457,460 457,469 cw(c464.5,469) 472,469 472,460 ccw(c479.5,460) 487,460 487,496 cw(c494.5,496) 502,496 502,460 ccw(c509.5,460) 517,460 517,530 cw(c524.5,530) 524.97,537.49 529.51,537.49 549,518 549,507 532,490 532,460 ccw(c539.5,460) 540.03,452.52 552.52,452.52 560,460 v1(560,488) ; 1141.5,598.5 1132,589 1132,578 1144,566 v1(1144,563)
  Bottom Layer w5: v1(267,495) 255,483 255,385.09 263.58,376.52 cw(c258,371.5) 258,364 ccw(c258,356.5) 258,349 cw(c258,341.5) 258,334 ccw(c258,326.5) 258,319 cw(c258,311.5) 258,304 ccw(c258,296.5) 250.51,296.08 250.51,199.49 345,105 387,105 410,82 442,82 454,70 485.91,70 JK8.7@516.54,39.37 ; v1(560,488) 542,488 537,493 537,523 ccw(c529.5,523) 522,523 522,493 cw(c514.5,493) 507,493 507,556 ccw(c499.5,556) 492,556 492,478 501,469 921,469 951,499 1066,499 1083,516 1083,538 1095,550 1105,550 1118,563 v1(1144,563)
SD2_D0: JK8.2 U1.M4 U9.K2 | length 2440
  Top Layer w4: U1.M4@1180.77,664.5 1190.11,655.16 1192.68,652.6 1192.68,600
  Top Layer w5: U9.K2@154.37,669.29 129.29,669.29 91,631 91,487 158,420 v1(164,420) 328,420 343,405 374,405 391.5,387.5 391.5,376.5 420,348 v1(548,348) ; 1192.68,600 1192.68,589.32 v1(1211,571)
  Bottom Layer w5: v1(164,420) 150,434 136.1,434 105.09,402.99 cw(c100,408.5) 100,401 91,401 ccw(c91,393.5) 91,386 102,386 cw(c102,378.5) 102,371 91,371 ccw(c91,363.5) 91,356 102,356 cw(c102,348.5) 102,341 91,341 ccw(c91,333.5) 91,326 102,326 cw(c102,318.5) 102,311 91,311 ccw(c91,303.5) 91,296 102,296 cw(c102,288.5) 102,281 91,281 ccw(c91,273.5) 91,266 102,266 cw(c102,258.5) 109.49,258.08 109.49,246.51 266.54,89.46 JK8.2@266.54,39.37 ; v1(548,348) 562,362 927,362 939,350 1101,350 1122,371 1195,371 1215,391 1215,448 1230,463 1230,555 1214,571 v1(1211,571)
SD2_D1: JK8.5 U1.M3 U9.N2 | length 2440.3
  Top Layer w5: U9.N2@154.37,551.18 138.18,551.18 129,542 129,503 163,469 v1(217,469) v1(290,469) ; U1.M3@1155.18,664.5 v1(1164.52,655.16)
  Bottom Layer w5: v1(217,469) 217,433 221,429 cw(c215.42,423.98) 215.42,416.48 ccw(c215.42,408.98) 215.42,401.48 cw(c215.42,393.98) 215.42,386.48 211,386.48 ccw(c211,378.98) 211,371.48 215.42,371.48 cw(c215.42,363.98) 215.42,356.48 211,356.48 ccw(c211,348.98) 211,341.48 215.42,341.48 cw(c215.42,333.98) 215.42,326.48 211,326.48 ccw(c211,318.98) 211,311.48 215.42,311.48 cw(c215.42,303.98) 215.42,296.48 211,296.48 ccw(c211,288.98) 211,281.48 215.42,281.48 cw(c215.42,273.98) 215.42,266.48 211,266.48 ccw(c211,258.98) 211,251.48 215.42,251.48 cw(c215.42,243.98) 215.42,236.48 ccw(c215.42,228.98) 215.42,221.48 cw(c215.42,213.98) 222.86,213.02 222.86,192.14 335,80 375.91,80 JK8.5@416.54,39.37 ; v1(290,469) 302,457 302,454 ccw(c309.5,454) 317,454 317,533 cw(c324.5,533) 332,533 332,454 ccw(c339.5,454) 347,454 347,488 cw(c354.5,488) 362,488 362,454 ccw(c369.5,454) 377,454 377,488 cw(c384.5,488) 392,488 392,454 ccw(c399.5,454) 407,454 407,488 cw(c414.5,488) 422,488 422,456 432,446 931,446 961,476 1076,476 1096,496 1134,496 1150,512 1150,523 1161,534 1161,571 1153,579 1153,626 1164.52,637.52 v1(1164.52,655.16)
SD2_D2: JK8.3 U1.M5 U9.K3 | length 2440.3
  Top Layer w5: U9.K3@193.74,669.29 174.45,650 131,650 105,624 105,491 160.51,435.49 v1(181,435.49) 340.97,435.49 cw(c340.5,428) 348,428 ccw(c355.5,428) 363,428 cw(c370.5,428) 378,428 ccw(c385.5,428) 393,428 cw(c400.5,428) 408,428 408,384 420,372 v1(490,372) ; U1.M5@1206.36,664.5 v1(1215.7,655.16)
  Bottom Layer w5: v1(181,435.49) 181,412 171,402 129,402 ccw(c129,394.5) 129,387 140,387 cw(c140,379.5) 140,372 129,372 ccw(c129,364.5) 129,357 140,357 cw(c140,349.5) 140,342 129,342 ccw(c129,334.5) 129,327 140,327 cw(c140,319.5) 140,312 129,312 ccw(c129,304.5) 129,297 140,297 cw(c140,289.5) 140,282 136.4,282 ccw(c136.4,274.5) 136.4,267 140,267 cw(c140,259.5) 140,252 ccw(c140,244.5) 134.5,239.4 147.9,226 161,226 176,211 176,200 316.54,59.46 JK8.3@316.54,39.37 ; v1(490,372) 494,368 522,368 540,386 937,386 949,374 1089,374 1111,396 1111,426 1125,440 1174,440 1206,472 1206,524 1196,534 1196,589 1187,598 1187,611 1202,626 1202,641.46 v1(1215.7,655.16)
SD2_D3: JK8.4 U1.L5 U9.N3 | length 2440.2
  Top Layer w5: U9.N3@193.74,551.18 172.92,572 136,572 117,553 117,497 163,451 v1(198,451) 302,451 307.5,456.5 307.5,462 cw(c315,462) 322.5,462 322.5,455 ccw(c330,455) 337.5,455 cw(c345,455) 352.5,455 ccw(c360,455) 367.5,455 cw(c375,455) 382.5,455 ccw(c390,455) 397.5,455 cw(c405,455) 412.5,455 412.5,452.5 418,447 431,447 446.49,431.51 446.49,421.51 454,414 479,414 502,437 521,437 534,424 534,405 513,384 v1(511,384)
  Top Layer w10: U1.L5@1206.36,690.09 v1(1215.7,680.75)
  Bottom Layer w5: v1(198,451) 198,428 194,424 194,404 188.5,398.5 188.5,382 cw(c181,382) 181,374.5 170,374.5 ccw(c170,367) 170,359.5 181,359.5 cw(c181,352) 181,344.5 170,344.5 ccw(c170,337) 170,329.5 181,329.5 cw(c181,322) 181,314.5 170,314.5 ccw(c170,307) 170,299.5 181,299.5 cw(c181,292) 181,284.5 170,284.5 ccw(c170,277) 170,269.5 181,269.5 cw(c181,262) 181,254.5 170,254.5 ccw(c170,247) 170,239.5 181,239.5 cw(c181,232) 188.5,232 188.5,207.5 329,67 354,67 366.54,54.46 JK8.4@366.54,39.37 ; v1(511,384) 525,398 944,398 957,385 1083,385 1099,401 1099,431 1120,452 1169,452 1194,477 1194,518 1184,528 1184,584 1176,592 1176,616 1191,631 1191,656.05 v1(1215.7,680.75)
SD2_S\D\: JK8.1 U1.B7 | length 2582.5
  Top Layer w5: JK8.1@216.54,39.37 216.54,115.46 189,143 189,158 131,216 87,216 73.01,229.99 73.01,318.99 10.5,381.5 10.5,1022.5 81,1093 v1(408,1093) ; v1(552,1109) 606,1109 696,1199 1061,1199 1075,1185 1083,1185 1245,1023 1245,932.95 U1.B7@1257.54,920.41
  Bottom Layer w5: v1(408,1093) 536,1093 v1(552,1109)
SDRAM_A0: U1.C2 U2.H7 | length 880.9
  Top Layer w5: v3(682,897) 697.51,881.49 U2.H7@697.51,873.01 ; v3(716,898) 723,905 1043,905 1046,908 1116.41,908 U1.C2@1129.59,894.82
  Bottom Layer w5: v3(682,897) 678.5,900.5 678.5,1006.5 691,1019 724,1019 730,1025 730,1053 cw(c737.5,1053) 745,1053 745,1011 737,1003 703,1003 693.5,993.5 693.5,924.5 716,902 v3(716,898)
SDRAM_A1: U1.G1 U2.H8 | length 880.8
  Top Layer w5: U2.H8@697.51,841.51 682,826 682,801 673.51,792.51 624.49,792.51 615,802 604,802 597.97,795.97 597.97,745.49 ccw(c605.47,745.49) 605,738 cw(c605,730.5) 605,723 ccw(c605,715.5) 605,708 cw(c605,700.5) 605,693 ccw(c605,685.5) 597.51,685.97 597.51,677.49 638,637 883,637 1038.46,792.46 U1.G1@1104,792.46
SDRAM_A2: U1.G3 U2.J8 | length 885.5
  Top Layer w5: U2.J8@666.02,841.51 626.51,841.51 584,799 584,674 633,625 887,625 1042,780 1142.72,780 U1.G3@1155.18,792.46
SDRAM_A3: U1.H1 U2.J7 | length 885.9
  Top Layer w5: U2.J7@666.02,873.01 625.01,873.01 572,820 572,669 628,613 892,613 1045.87,766.87 U1.H1@1104,766.87
SDRAM_A4: U1.A6 U2.J3 | length 881.5
  Top Layer w5: U2.J3@666.02,998.99 633,1032.01 633,1099 708,1174 1078,1174 1231.95,1020.05 U1.A6@1231.95,946
SDRAM_A5: U1.B6 U2.J2 | length 879.9
  Top Layer w5: U2.J2@666.02,1030.49 646,1050.5 646,1092 715,1161 1071.55,1161 1077,1155.55 cw(c1072.27,1149.73) 1077.57,1144.43 ccw(c1082.88,1139.12) 1088.18,1133.82 cw(c1093.48,1128.52) 1098.79,1123.21 ccw(c1104.09,1117.91) 1109.39,1112.61 cw(c1114.7,1107.3) 1120,1102 ccw(c1125.3,1096.7) 1125.04,1089.2 1143.8,1089.2 1219.16,1013.84 1219.16,933.2 U1.B6@1231.95,920.41
SDRAM_A6: U1.B1 U2.H3 | length 880.2
  Top Layer w5: U2.H3@698,998.5 U2.H3@697.51,998.99 678.52,980 655,980 619.5,1015.5 619.5,1076.5 ccw(c609.5,1076.5) 599.5,1076.5 599.5,1000.5 583,984 583,930 595,918 1036.59,918 1039,920.41 U1.B1@1104,920.41 1101.59,918 U1.B1@1104.41,918
SDRAM_A7: U1.A5 U2.H2 | length 880.6
  Top Layer w5: U2.H2@697.51,1030.49 681,1047 681,1070 685,1074 685,1112 721.4,1148.4 894.77,1148.4 cw(c896,1141) 903.5,1141 ccw(c911,1141) 918.5,1141 cw(c926,1141) 933.5,1141 ccw(c941,1141) 948.5,1141 cw(c956,1141) 963.5,1141 ccw(c971,1141) 978.5,1141 cw(c986,1141) 993.5,1141 ccw(c1001,1141) 1008.5,1141 cw(c1016,1141) 1023.5,1141 ccw(c1031,1141) 1038.5,1141 cw(c1046,1141) 1050.16,1147.24 1063,1134.4 1063,1128 1115,1076 1136,1076 1142,1070 cw(c1137.27,1064.18) 1142.57,1058.88 ccw(c1147.88,1053.57) 1153.18,1048.27 cw(c1158.48,1042.97) 1163.79,1037.66 ccw(c1169.09,1032.36) 1174.39,1027.06 cw(c1179.7,1021.75) 1185,1016.45 ccw(c1190.3,1011.15) 1190.04,1003.65 1198,1003.65 1206.36,995.29 1206.36,967.36 1202,963 1202,950.36 U1.A5@1206.36,946
SDRAM_A8: U1.A4 U2.H1 | length 880.9
  Top Layer w5: U2.H1@697.51,1061.98 697.51,1107.51 726,1136 734,1136 cw(c734,1128.5) 741.5,1128.5 ccw(c749,1128.5) 756.5,1128.5 cw(c764,1128.5) 771.5,1128.5 ccw(c779,1128.5) 786.5,1128.5 cw(c794,1128.5) 801.5,1128.5 ccw(c809,1128.5) 816.5,1128.5 cw(c824,1128.5) 831.5,1128.5 ccw(c839,1128.5) 846.5,1128.5 cw(c854,1128.5) 861.5,1128.5 ccw(c869,1128.5) 876.5,1128.5 cw(c884,1128.5) 889.53,1133.57 902.1,1121 948.5,1121 951.5,1124 cw(c956,1118) 963.5,1118 ccw(c971,1118) 978.5,1118 cw(c986,1118) 993.5,1118 ccw(c1001,1118) 1008.5,1118 cw(c1016,1118) 1023.5,1118 ccw(c1031,1118) 1033.95,1111.11 1034.11,1111.11 1044,1121 1050.55,1121 1052.52,1119.03 cw(c1047.79,1113.21) 1053.09,1107.91 ccw(c1058.39,1102.61) 1063.7,1097.3 cw(c1069,1092) 1074.3,1086.7 ccw(c1079.61,1081.39) 1084.91,1076.09 cw(c1090.21,1070.79) 1095.52,1065.48 ccw(c1100.82,1060.18) 1106.12,1054.87 1112.25,1061 cw(c1117.55,1055.7) 1122.86,1050.4 1116.73,1044.27 ccw(c1122.03,1038.97) 1121.99,1031.47 1139.53,1031.47 1154,1017 1154,1007 1165,996 1175,996 1179,992 1185,992 1192,985 1192,971.64 1189,968.64 1189,954.23 U1.A4@1180.77,946
SDRAM_A9: U1.B2 U2.G3 | length 880.7
  Top Layer w5: U2.G3@729.01,998.99 712.02,982 700,982 685,967 649,967 627,989 607,989 596,978 596,938.5 ccw(c603.5,938.5) 611,938.5 611,967 cw(c618.5,967) 626,967 626,938.5 ccw(c633.5,938.5) 641,938.5 641,946 cw(c648.5,946) 656,946 656,938.5 ccw(c663.5,938.5) 671,938.5 671,946 cw(c678.5,946) 686,946 686,939 694,931 1029,931 1031.59,933.59 1116.41,933.59 U1.B2@1129.59,920.41
SDRAM_A10: U1.G2 U2.H9 | length 880.9
  Top Layer w5: U2.H9@697.51,810.02 697.51,795.51 681,779 618.5,779 ccw(c618.5,771.5) 618.5,764 632,764 cw(c632,756.5) 632,749 630.5,749 ccw(c630.5,741.5) 630.5,734 632,734 cw(c632,726.5) 632,719 630.5,719 ccw(c630.5,711.5) 630.5,704 633,704 cw(c633,696.5) 633,689 626,689 ccw(c626,681.5) 618.57,682.49 618.57,673.43 644,648 878,648 1035,805 1117.05,805 U1.G2@1129.59,792.46
SDRAM_A11: U1.B4 U2.G2 | length 880.4
  Top Layer w5: U2.G2@729.01,1030.49 713,1046.5 713,1071 710,1074 710,1104 724,1118 732,1118 742,1108 949.5,1108 963.5,1094 963.5,1086 ccw(c971,1086) 978.5,1086 978.5,1094 cw(c986,1094) 993.5,1094 993.5,1083 ccw(c1001,1083) 1008.5,1083 1008.5,1094 cw(c1016,1094) 1020.88,1099.69 1024.61,1095.96 1024.61,1074.92 ccw(c1032.09,1075.48) 1037.39,1070.18 1045.61,1078.39 cw(c1050.91,1073.09) 1056.22,1067.79 1048,1059.57 ccw(c1053.3,1054.27) 1058.6,1048.96 1066.82,1057.18 cw(c1072.12,1051.88) 1077.43,1046.57 1069.21,1038.36 ccw(c1074.52,1033.06) 1079.82,1027.75 1088.03,1035.96 cw(c1093.33,1030.66) 1098.63,1025.35 ccw(c1103.94,1020.05) 1109.24,1014.74 1113.49,1019 1132,1019 1141,1010 1141,993 1151,983 1170,983 1176,977 1176,964 1168,956 1168,933.18 U1.B4@1180.77,920.41
SDRAM_A12: U1.A3 U2.G1 | length 880.2
  Top Layer w5: U2.G1@729.01,1061.98 729.01,1070.99 721,1079 721,1098 725,1102 731,1102 737,1096 945,1096 952,1089 952,1077 961,1068 961,1035 ccw(c968.5,1035) 976,1035 976,1062 cw(c983.5,1062) 991,1062 991,1035 ccw(c998.5,1035) 1006,1035 1006,1055 cw(c1013.5,1055) 1021,1055 1021,1043 ccw(c1028.5,1043) 1029.88,1035.63 1045.37,1035.63 cw(c1045.37,1028.13) 1045.37,1020.63 1029.88,1020.63 ccw(c1029.88,1013.13) 1029.88,1005.63 1042.87,1005.63 cw(c1042.87,998.13) 1042.87,990.63 1029.88,990.63 ccw(c1029.88,983.13) 1029.88,975.63 1049.63,975.63 1063,989 1063,1005.23 1070.77,1013 1082,1013 1095,1000 1111,1000 1117,1006 1125,1006 1130,1001 1130,988 1155.18,962.82 U1.A3@1155.18,946
SDRAM_BA0: U1.C1 U2.G7 | length 882.9
  Top Layer w5: v3(1050,880) 1067,897 1101.82,897 U1.C1@1104,894.82
  Top Layer w10: U2.G7@729.01,873.01 v3(741.8,885.8)
  Bottom Layer w5: v3(741.8,885.8) 733,894.61 733,905 707,931 707,981.5 cw(c714.5,981.5) 722,981.5 ccw(c729.5,981.5) 737,981.5 748.5,993 827,993 839,981 839,957 843,953 843,918 ccw(c850.5,918) 858,918 858,942 cw(c865.5,942) 873,942 873,918 ccw(c880.5,918) 888,918 888,942.5 cw(c895.5,942.5) 903,942.5 903,918 ccw(c910.5,918) 918,918 918,960.3 cw(c925.5,960.3) 933,960.3 933,895 945,883 1047,883 v3(1050,880)